# EAGLE board ThingPlus_Micromod-TopJig (EAGLE 9.6.2)

Size 106.7 x 37.44 mm. Coordinates in mm from the lower left corner, seen from the top.
Outline: 96.52,30.16 89.41,30.16 89.41,33.08 74.17,33.08 74.17,30.16 7.62,30.16 arc180 5.84,28.38 5.84,25.84 arc-100 4.57,24.57 2.54,24.57 arc-80 0,27.11 0,33.46 arc-80 7.62,37.27 104.14,37.27 arc-80 106.68,33.46 106.68,2.98 arc-80 104.14,0.44 7.62,0.44 arc-80 0,2.98 0,9.33 arc-80 2.54,11.87 4.57,11.87 arc-100 5.84,10.6 5.84,8.06 arc180 7.62,6.28
Outline: 96.52,30.16 96.77,30.16
Outline: 96.52,30.16 arc-180 98.3,28.38 98.3,26.35 101.47,26.35 101.47,10.09 98.3,10.09 98.3,8.06 arc-180 96.52,6.28 7.62,6.28
Outline: 7.62,6.28 7.37,6.28
Copper layers (1*16): Top 0.035mm / dielectric 1.5mm / Bottom 0.035mm
Design rules "SparkFun-2-Layer-General-JLCPCB": minimum track width 7mil, minimum drill 0.3mm, track to track 7mil, track to pad 7mil, pad to pad 7mil, via to via 7mil, smd to smd 7mil, copper to edge 7mil, drill to drill 7mil, minimum pad ring 7mil, minimum via ring 7mil, stop-mask expansion 4mil, vias tented up to drill 25mil, thermal gap 10mil
Net classes: 0 default: width 0 mm, drill 0 mm; 1 power: width 0.457 mm

## Footprints (pad centres in the part's own frame; a part is rotated, then mirrored left to right if it is on the bottom)
STAND-OFF-TIGHT = hole 3.048: 0,0
NUBBIN_LOCKER = hole 2.794: 0,0

## Placement (x,y rotation side)
E$1  [STAND-OFF-TIGHT]  3.17,6.79 0 top
E$2  [STAND-OFF-TIGHT]  3.17,29.65 0 top
E$3  [STAND-OFF-TIGHT]  100.96,6.79 0 top
E$4  [STAND-OFF-TIGHT]  100.96,29.65 0 top
E$5  [NUBBIN_LOCKER]  52.07,2.47 0 top
E$6  [NUBBIN_LOCKER]  52.07,33.97 0 top
FRAME1  FRAME-LEDGER  [CREATIVE_COMMONS]  28.19,43.36 0 top  (outside the outline)

## Library data of the parts
E$1-E$6 = SparkFun-Hardware
FRAME1 = SparkFun-Aesthetics; DESIGNER: Ricardo R.

## Text on the board
Top: Up-TopLayer
Bottom: Down-TopLayer
tPlace: #88 | MicroMod Thing Plus | 18027
tDocu: Ricardo R.